# Altium PCB pulsePreamplifier.PcbDoc
Units mil, origin at the board's own origin, x right, y up, seen from the top; angles counter-clockwise.
Board outline 1082.68 x 2755.91 mil, 2 copper layers (Top Layer, Bottom Layer); 46 components, 21 nets, 117 pads, 195 vias.
Unrouted connection lines stored in the file: 1.
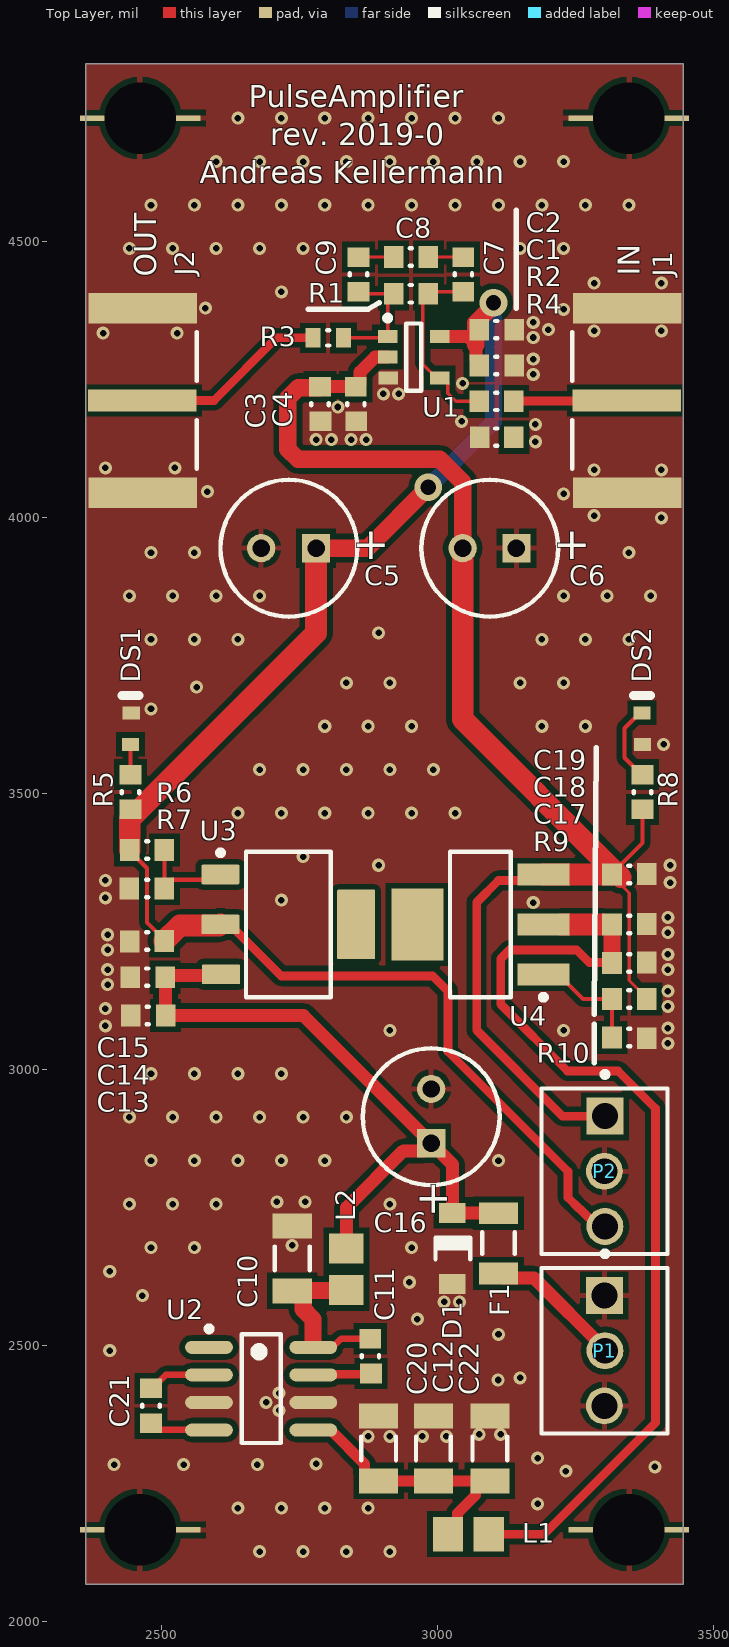
[diagram p0: Top Layer view]
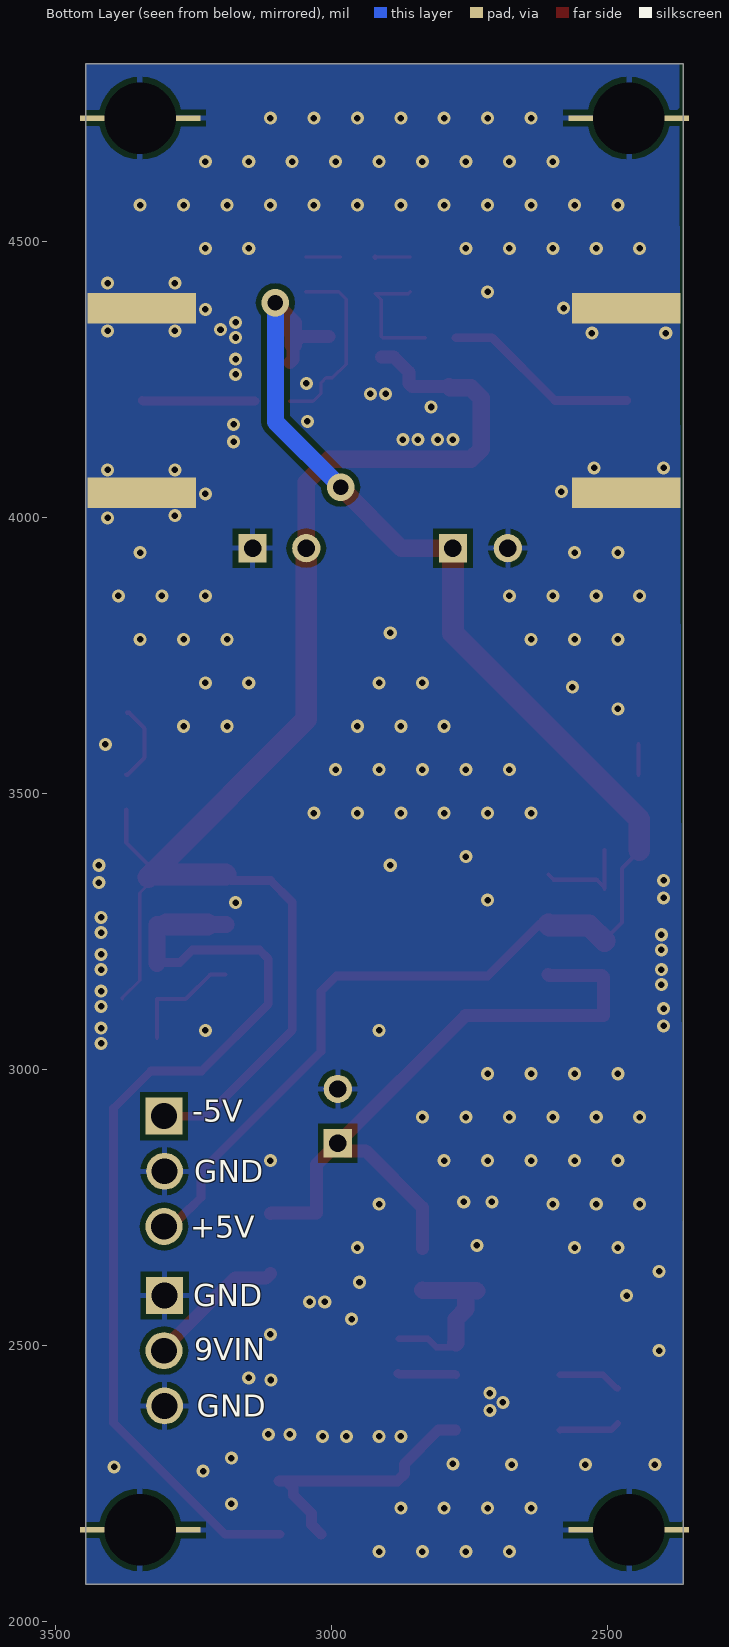
[diagram p1: Bottom Layer view, seen from below]

## Layer stack, top to bottom
Top Solder: solder mask 0.4, Solder Resist, Dk 3.5
Top Layer: signal copper 1.4
Dielectric 1: dielectric 12.6, FR-4, Dk 4.8
Bottom Layer: signal copper 1.4
Bottom Solder: solder mask 0.4, Solder Resist, Dk 3.5

## Board outline
2362.2,4822.83 3444.88,4822.83 3444.88,2066.93 2362.2,2066.93

## Design rules (kind name [scope] priority, off if disabled: settings)
Clearance [All] p1: gap=10 ignorepadtopadclearanceinfootprint=FALSE except(0: Arc-Hole Track-Hole SMDPad-Hole THPad-Hole Via-Hole Fill-Hole Poly-Hole Region-Hole Text-Hole)
PolygonConnect [All] p1: thpad.connectstyle=Relief thpad.reliefconductorwidth=10 thpad.reliefentries=4 thpad.polygonreliefangle="90 Angle" thpad.airgapwidth=10 smdpad.connectstyle=Direct smdpad.reliefconductorwidth=10 smdpad.reliefentries=4 smdpad.polygonreliefangle="90 Angle" smdpad.airgapwidth=10 via.connectstyle=Direct via.reliefconductorwidth=10 via.reliefentries=4 via.polygonreliefangle="90 Angle" via.airgapwidth=10
RoomDefinition pulsePreamplifier [InComponentClass('pulsePreamplifier')] p1: confinementstyle=ConfineIn formatcopy=TRUE lockcomponents=FALSE outline 7045,1060 17145,1060 17145,1755 7045,1755
RoutingVias [All] p1: holewidth=11.81 width=23.62 viastyle="Through Hole" minholewidth=11.81 minwidth=23.62 maxholewidth=236.22 maxwidth=78.74
SolderMaskExpansion [All] p1: expansion=4
Width [All] p1: maxlimit=196.85 minlimit=6 preferedwidth=7.87
30 further rules are at their usual default settings.

## Components (designator, comment, footprint, x,y, rotation, side; value= is the part's Value field where it differs from the comment)
C1 "100nF" CAPC0603(1608)100_N#1 3106.5,4276.06 r180 top
C2 "1uF" CAPC0603(1608)100_N#1 3106.5,4341.06 r180 top value=100nF
C3 "100nF" CAPC0603(1608)100_N#2 2786.5,4206.06 r90 top
C4 "1uF" CAPC0603(1608)100_N#2 2851.5,4206.06 r90 top value=100nF
C5 "ECA-1HM470" PNSC-ECA-1HM470#1 2730.32,3944.88 r180 top
C6 "ECA-1HM470" PNSC-ECA-1HM470#2 3094.49,3944.88 r180 top
C7 "tbd" CAPC0603(1608)100_N#3 3046.5,4441.06 r270 top value=100nF
C8 "tbd" CAPC0603(1608)100_N#3 2951.5,4472.56 r0 top value=100nF
C9 "tbd" CAPC0603(1608)100_N#3 2856.5,4441.06 r90 top value=100nF
C10 "10uF" CAPC1206(3216)190_N 2736.34,2657.48 r270 top value=4.7uF
C11 "opt" CAPC0603(1608)100_N#2 2877.95,2480.32 r90 top value=100nF
C12 "10uF" CAPC1206(3216)190_N 2992.13,2312.99 r270 top value=4.7uF
C13 "100nF" CAPC0603(1608)100_N#4 2474.24,3097.8 r0 top
C14 "1uF" CAPC0603(1608)100_N#4 2473.33,3167.24 r0 top value=100nF
C15 "1uF" CAPC0603(1608)100_N#2 2473.19,3232.8 r0 top value=100nF
C16 "ECA-1HM470" PNSC-ECA-1HM470#3 2988.19,2914.31 r90 top
C17 "100nF" CAPC0603(1608)100_N#2 3347.44,3192.72 r180 top
C18 "1uF" CAPC0603(1608)100_N#2 3347.44,3262.72 r180 top value=100nF
C19 "1uF" CAPC0603(1608)100_N#2 3347.44,3353.27 r180 top value=100nF
C20 "10uF" CAPC1206(3216)190_N 2893.06,2312.99 r270 top value=4.7uF
C21 "1uF" CAPC0603(1608)100_N#3 2480.32,2390.16 r270 top value=100nF
C22 "10uF" CAPC1206(3216)190_N 3094.49,2312.99 r270 top value=4.7uF
D1 "MMSD4148T3G" ONSC-SOD123-2-425G-04_V 3027.56,2675.35 r270 top
DS1 "TLMS1100-GS08" VISH-TLMX1100_V#1 2443.19,3617.8 r90 top
DS2 "TLMS1100-GS08" VISH-TLMX1100_V#2 3370.31,3617.8 r90 top
F1 "ptc" LFUS-1206L012WR_V 3110.24,2685.04 r270 top
J1 "32K145-400L5" ROS-32K145-400L5_V#1 3440.94,4212.6 r270 top locked
J2 "32K145-400L5" ROS-32K145-400L5_V#2 2366.14,4212.6 r90 top locked
L1 "FBMJ2125HM210NT" INDC2013X105X50ML20T30#1 3055.12,2157.48 r0 top
L2 "FBMJ2125HM210NT" INDC2013X105X50ML20T30#2 2834.65,2637.8 r270 top
P1 "22-27-2031" MOLX-22-27-2031_V#1 3303.17,2490.16 r270 top
P2 "22-27-2031" MOLX-22-27-2031_V#2 3303.17,2815.35 r270 top
R1 "tbd" RESC0603(1608)_N#1 2951.5,4406.06 r180 top value="100.00 Ohm"
R2 "100" RESC0603(1608)_N#1 3106.5,4211.06 r180 top value="100.00 Ohm"
R3 "100" RESC0603(1608)_L 2801.5,4326.06 r180 top value="100.00 Ohm"
R4 "100k" RESC0603(1608)_N#2 3106.5,4146.06 r0 top value="100.00 Ohm"
R5 "330" RESC0603(1608)_N#1 2443.19,3502.8 r90 top value="100.00 Ohm"
R6 "tbd" RESC0603(1608)_N#1 2473.19,3397.8 r0 top value="100.00 Ohm"
R7 "tbd" RESC0603(1608)_N#3 2473.19,3327.8 r180 top value="100.00 Ohm"
R8 "330" RESC0603(1608)_N#1 3371.36,3502.8 r90 top value="100.00 Ohm"
R9 "tbd" RESC0603(1608)_N#1 3347.44,3127.72 r180 top value="100.00 Ohm"
R10 "tbd" RESC0603(1608)_N#4 3347.44,3057.72 r0 top value="100.00 Ohm"
U1 "i11 -- OPA659IDBVT" TI-DBV5_L 2956.5,4291.06 r0 top
U2 "TC1044SEOA713" SOIC-OA8_N 2680.06,2421.26 r0 top
U3 "LM317AEMP" DCY0004A_N 2729.24,3262.8 r0 top
U4 "i4 -- LM337IMPX" MP04A_N 3077.44,3262.72 r180 top

## Footprints (in the part's own frame and the unit in brackets; to place one, negate y for a bottom-side part, rotate by r counter-clockwise, add the part's x,y. Pads: shape width x height; smd on the part's side, far side on the other; paste and mask are expansions set on the pad)
CAPC0603(1608)100_N#1 [mm] "Chip Capacitor, Body 1.6x0.8mm, Height 1.0mm, IPC Medium Density"
  rect 0.9x1 smd: 1(-0.827,0) 2(0.8,0)
  silkscreen extent -0.05,-0.4 0.05,0.4, body extent -0.87,-0.48 0.88,0.47, height 1
CAPC0603(1608)100_N#2 [mm] "Chip Capacitor, Body 1.6x0.8mm, Height 1.0mm, IPC Medium Density"
  rect 0.9x1 smd: 1(-0.8,-0.027) 2(0.8,0)
  silkscreen extent -0.05,-0.4 0.05,0.4, body extent -0.87,-0.48 0.88,0.47, height 1
CAPC0603(1608)100_N#3 [mm] "Chip Capacitor, Body 1.6x0.8mm, Height 1.0mm, IPC Medium Density"
  rect 0.9x1 smd: 1(-0.8,0) 2(0.8,0)
  silkscreen extent -0.05,-0.4 0.05,0.4, body extent -0.87,-0.48 0.88,0.47, height 1
CAPC0603(1608)100_N#4 [mm] "Chip Capacitor, Body 1.6x0.8mm, Height 1.0mm, IPC Medium Density"
  rect 0.9x1 smd: 1(-0.773,0) 2(0.827,0)
  silkscreen extent -0.05,-0.4 0.05,0.4, body extent -0.87,-0.48 0.88,0.47, height 1
CAPC1206(3216)190_N [mm] "Chip Capacitor, Body 3.2x1.6mm, Height 1.9mm, IPC Medium Density"
  rect 1.15x1.8 smd: 1(-1.5,0) 2(1.5,0)
  silkscreen extent -0.55,-0.8 0.55,0.8, body extent -1.7,-0.9 1.7,0.9, height 1.9
DCY0004A_N [mm] "SOT223, 4-Leads, Body 6.7x3.7mm, Pitch 2.3mm, IPC Medium Density"
  rrect11% 1.75x0.9 smd: 1(-3.125,2.3) 2(-3.125,0) 3(-3.098,-2.3)
  rrect6% 1.75x3.2 smd: 4(3.125,0)
  silkscreen extent -3.25,-3.35 1.95,3.42, body extent -3.5,-3.25 3.5,3.25, height 1.62
INDC2013X105X50ML20T30#1 [mm] "Chip Inductor, 2-Leads, Body 2.2x1.45mm, IPC Low Density"
  rect 1.39x1.59 smd: 1(-0.928,0) 2(0.955,0)
  body extent -1.1,-0.72 1.1,0.72, height 1.05
INDC2013X105X50ML20T30#2 [mm] "Chip Inductor, 2-Leads, Body 2.2x1.45mm, IPC Low Density"
  rect 1.39x1.59 smd: 1(-0.955,0) 2(0.955,0)
  body extent -1.1,-0.72 1.1,0.72, height 1.05
LFUS-1206L012WR_V [mm] "SMD, 2-Leads, Body 3.2x1.65mm"
  rect 1x1.8 smd: 1(-1.373,0) 2(1.4,0)
  silkscreen extent -0.5,-0.75 0.5,0.75, body extent -1.6,-0.82 1.6,0.82, height 1.45
MOLX-22-27-2031_V#1 [mm] "Header, 3-Leads, Body 7.62x5.8mm, Pitch 2.54mm"
  rect 1.7x1.7 hole 1.19 paste+0: 1(-2.54,-0.027)
  round 1.7 hole 1.19 paste+0: 2(0,0) 3(2.54,-0.027)
  silkscreen extent -4.58,-2.92 3.81,2.88, body extent -3.81,-2.92 3.81,2.88, height 11.71
MOLX-22-27-2031_V#2 [mm] "Header, 3-Leads, Body 7.62x5.8mm, Pitch 2.54mm"
  rect 1.7x1.7 hole 1.19 paste+0: 1(-2.54,0)
  round 1.7 hole 1.19 paste+0: 2(0,-0.027) 3(2.54,0)
  silkscreen extent -4.58,-2.92 3.81,2.88, body extent -3.81,-2.92 3.81,2.88, height 11.71
MP04A_N [mm] "SOT223, 4-Leads, Body 6.5x3.5mm, Pitch 2.3mm, Lead Span 7mm, IPC Medium Density"
  rect 2.4x1 smd: 1(-2.9,2.3) 2(-2.9,0) 3(-2.9,-2.3)
  rect 2.4x3.3 smd: 4(2.9,0)
  silkscreen extent -3.03,-3.35 1.4,3.47, body extent -1.86,-3.35 1.86,3.35, height 1.8
ONSC-SOD123-2-425G-04_V [mm] "SOD123, 2-Leads, Body 2.69x1.6mm, Height 1.35mm"
  rect 0.915x1.22 smd: 1(-1.637,-0.027) 2(1.637,-0.027)
  silkscreen extent -0.5,-0.8 0.5,0.8, body extent -1.35,-0.8 1.35,0.8, height 1.35
PNSC-ECA-1HM470#1 [mm]
  rect 1.3x1.3 hole 0.8: 1(-1.25,0)
  round 1.3 hole 0.8: 2(1.277,0)
  silkscreen extent -3.15,-3.15 3.15,3.15, body extent -3.15,-3.15 3.15,3.15, height 12.2
PNSC-ECA-1HM470#2 [mm]
  rect 1.3x1.3 hole 0.8: 1(-1.223,0)
  round 1.3 hole 0.8: 2(1.25,0)
  silkscreen extent -3.15,-3.15 3.15,3.15, body extent -3.15,-3.15 3.15,3.15, height 12.2
PNSC-ECA-1HM470#3 [mm]
  rect 1.3x1.3 hole 0.8: 1(-1.223,0)
  round 1.3 hole 0.8: 2(1.277,0)
  silkscreen extent -3.15,-3.15 3.15,3.15, body extent -3.15,-3.15 3.15,3.15, height 12.2
RESC0603(1608)_L [mm] "Chip Resistor, Body 1.6x0.8mm, IPC High Density"
  rect 0.7x0.9 smd: 1(-0.7,0) 2(0.7,0)
  silkscreen extent -0.05,-0.35 0.05,0.35, body extent -0.85,-0.47 0.85,0.47, height 0.6
RESC0603(1608)_N#1 [mm] "Chip Resistor, Body 1.6x0.8mm, IPC Medium Density"
  rect 0.9x1 smd: 1(-0.8,0) 2(0.8,0)
  silkscreen extent -0.05,-0.4 0.05,0.4, body extent -0.85,-0.47 0.85,0.47, height 0.6
RESC0603(1608)_N#2 [mm] "Chip Resistor, Body 1.6x0.8mm, IPC Medium Density"
  rect 0.9x1 smd: 1(-0.773,0) 2(0.8,0)
  silkscreen extent -0.05,-0.4 0.05,0.4, body extent -0.85,-0.47 0.85,0.47, height 0.6
RESC0603(1608)_N#3 [mm] "Chip Resistor, Body 1.6x0.8mm, IPC Medium Density"
  rect 0.9x1 smd: 1(-0.8,0) 2(0.827,0)
  silkscreen extent -0.05,-0.4 0.05,0.4, body extent -0.85,-0.47 0.85,0.47, height 0.6
RESC0603(1608)_N#4 [mm] "Chip Resistor, Body 1.6x0.8mm, IPC Medium Density"
  rect 0.9x1 smd: 1(-0.8,0) 2(0.8,-0.027)
  silkscreen extent -0.05,-0.4 0.05,0.4, body extent -0.85,-0.47 0.85,0.47, height 0.6
ROS-32K145-400L5_V#1 [mm] "SMA Right Angle Jack, Edge Mount, 14.25x9.5x4.46mm, Rosenberger Recommended"
  rect 1x5 smd: 1(0,-2.5)
  rect 1.4x5 smd: MP(-4.25,-2.473) MP(4.25,-2.473)
  rect 1.4x5 smd far side paste-2: MP(-4.25,-2.473) MP(4.25,-2.473)
  silkscreen extent -3.15,-5 3.15,-5, body extent -4.75,-4.75 4.75,9.5, height 4.2
ROS-32K145-400L5_V#2 [mm] "SMA Right Angle Jack, Edge Mount, 14.25x9.5x4.46mm, Rosenberger Recommended"
  rect 1x5 smd: 1(0,-2.5)
  rect 1.4x5 smd: MP(-4.25,-2.527) MP(4.25,-2.527)
  rect 1.4x5 smd far side paste-2: MP(-4.25,-2.527) MP(4.25,-2.527)
  silkscreen extent -3.15,-5 3.15,-5, body extent -4.75,-4.75 4.75,9.5, height 4.2
SOIC-OA8_N [mm] "SOIC, 8-Leads, Body 4.9x3.9mm, Pitch 1.27mm, IPC Medium Density"
  oval 2.2x0.6 smd: 1(-2.4,1.905) 2(-2.4,0.635) 3(-2.4,-0.635) 4(-2.4,-1.905) 5(2.4,-1.905) 6(2.4,-0.635) 7(2.4,0.635) 8(2.4,1.905)
  silkscreen extent -2.52,-2.5 0.9,2.88, body extent -2,-2.5 2,2.5, height 1.75
TI-DBV5_L [mm] "SOT23, 5-Leads, Body 2.9x1.6mm, Pitch 0.95mm, IPC High Density"
  rect 0.9x0.6 smd: 1(-1.2,0.95) 2(-1.2,0) 3(-1.173,-0.95) 4(1.2,-0.95) 5(1.2,0.95)
  silkscreen extent -1.32,-1.55 0.35,1.92, body extent -0.87,-1.52 0.87,1.53, height 1.45
VISH-TLMX1100_V#1 [mm] "SMD, 2-Leads, Body 1.6x0.8mm"
  rect 0.6x0.8 smd: 1(-0.725,0) 2(0.725,-0.027)
  silkscreen extent 1.53,-0.4 1.53,0.4, body extent -0.8,-0.4 0.8,0.4, height 0.65
VISH-TLMX1100_V#2 [mm] "SMD, 2-Leads, Body 1.6x0.8mm"
  rect 0.6x0.8 smd: 1(-0.725,-0.027) 2(0.725,0)
  silkscreen extent 1.53,-0.4 1.53,0.4, body extent -0.8,-0.4 0.8,0.4, height 0.65

## Part data
C1 C3 C13 C17: library part CMP-1035-02589-1, "CAP 100nF 25V ±20% 0603 (1608 Metric) Thickness 1mm SMD", Case-EIA=0603, Case-Metric=1608, Rated Voltage="25 V", Tolerance=±20%, Max Thickness="1 mm", Technology=SMT
C2 C4 C7 C8 C9 C11 C14 C15 C18 C19 C21: library part CMP-1035-02589-1, "CAP 1uF 25V ±20% 0603 (1608 Metric) Thickness 1mm SMD", Case-EIA=0603, Case-Metric=1608, Rated Voltage="25 V", Tolerance=±20%, Max Thickness="1 mm", Technology=SMT
C5 C6 C16: library part CMP-1665-00013-1, "CAP ALUM 47UF 50V 20% RADIAL", ComponentLink1Description=Datasheet, ComponentLink1URL=http://industrial.panasonic.com/cdbs/www-data/pdf/RDF0000/ABA0000C1047.pdf, PackageReference=ECA-1HM470, PartNumber=ECA-1HM470
C10 C12 C20 C22: library part CMP-1037-04919-1, Case-EIA=1206, Case-Metric=3216, Rated Voltage="25 V", Tolerance=±20%, Max Thickness="1.9 mm", Technology=SMT
D1: library part CMP-0895-00002-1, "Switching Diode, 100 V, 200 mA, -55 to 150 degC, 2-Pin SOD123 (425), RoHS, Tape and Reel", Manufacturer="ON Semiconductor", Temperature Range="-55 to 150 degC", CD (Max)="4 pF", ComponentLink1Description="Manufacturer URL", ComponentLink1URL=http://www.onsemi.com/, ComponentLink2Description=Datasheet, ComponentLink2URL=http://www.onsemi.com/pub_link/Collateral/MMSD4148T1-D.PDF, ComponentLink3Description="Package Specification", ComponentLink3URL=http://www.onsemi.com/pub_link/Collateral/425-04.PDF, DatasheetVersion="Rev. 11", IR @ VR="75 V (Max)=50 uA", Mounting Technology="Surface Mount", PackageDescription="2-Pin SOD123, Body 2.69 x 1.6 mm, Height 1.35 mm", PackageReference=SOD123-2-425G-04, PackageVersion="Rev. 04G", Packing="Tape and Reel", PartNumber=MMSD4148T3G, PD (Max)="425 mW", RoHS=TRUE, Trr (Max)="4 ns", VBR (Min)="100 V", VF (Max)="1 A"
DS1 DS2: library part CMP-1666-00027-1, "LED, RED, 2.1 V, -40 to 100 degC, 2-Pin SMD (0603), RoHS, Tape and Reel", Capacitance="12 pF", Case/Package=0603, Case Code (Metric)=1608, Max Operating Temperature=125degC, Min Operating Temperature=-55degC, Package Quantity=4000, Resistance="100000000000 Ohm", Tolerance=5%, Type (Capacitors)=C0G, Voltage Rating="50 V", Case Code (Imperial)=0603, ComponentLink1Description="Manufacturer URL", ComponentLink1URL=http://www.vishay.com/, ComponentLink2Description=Datasheet, ComponentLink2URL=http://www.vishay.com/docs/83173/tlmb1100.pdf, DatasheetVersion="Rev. 2.7, 03/2016", Height="0.8 mm", Length="1.6 mm", Mount="Surface Mount", PackageDescription="2-Pin Surface Mount Device, Body 1.6 x 0.8 mm", PackageReference=TLMX1100, Packaging="Tape and Reel", Pins=2, Radiation Hardening=No, REACH SVHC="No SVHC", RoHSCompliant=True, Voltage Rating (DC)="50 V", Width="0.8 mm"
F1: library part CMP-2000-05470-1, "200mA PTC", Hold Current [Ih]=0.125A, Manufacturer=Littelfuse, Operating Temp Range=-40to+85°C, Package Description="2-Pin Surface Mount Device, Body 3.2 x 1.65 mm", Package Reference=1206, Trip Current=0.29A, Working Voltage-Max=30V, Datasheet URL=https://datasheet.ciiva.com/26787/1206l012wr-26787215.pdf, Datasheet Version=04/2012, Manufacturer URL=http://www.littelfuse.com/, Mounting Technology=SurfaceMount, Size=1206
J1 J2: library part CMP-0751-00004-2, "SMA Right Angle Jack, Edge Mount, Up to 18 GHz, -55 to 155 degC", Manufacturer=Rosenberger, ComponentLink1Description="Manufacturer URL", ComponentLink1URL=http://www.rosenberger.de, ComponentLink2Description=Datasheet, ComponentLink2URL=http://rosenberger.de/ok/images/documents/db/32K145-400L5.pdf, ComponentLink3Description="Package Specification", ComponentLink3URL=http://rosenberger.de/ok/images/documents/db/32K145-400L5.pdf, ComponentLink4Description="Series Overview / Design Note", ComponentLink4URL=http://rosenberger.de/ok/images/documents/spez/32.pdf, ComponentLink5Description="Webshop / RFQ", ComponentLink5URL=http://www.rosenberger.com/en/contact/sales/, DatasheetVersion=b00, Desgin Note 2="For more information about DRC setting, please look at following webpage, http://techdocs.altium.com/display/SCRT/Design+Rule+for+Edge-Mount+Connectors", Design Note 1="Footprint in library is a generic example - only application specific footprint delivers High Performance", Mounting Technology="Surface Mount", PackageDescription="SMA Right Angle Jack, Edge Mount, 14.25 x 9.5 x 4.46 mm", PackageReference=32K145-400L5, PackageVersion=b00, PartNumber=32K145-400L5
L1 L2: library part CMP-1660-00003-1, "Chip Inductor, 21 Ohm, +/- 30%, 6 A, -40 to 125 degC, 0805 (2012 Metric), RoHS, Tape and Reel", Case\Package=0805, Case Code (Metric)=2012, Current Rating="6 A", Max Operating Temperature="125 degC", Min Operating Temperature="-40 degC", Package Quantity=1, Resistance="4 mohm", Tolerance=30%, Case Code (Imperial)=0805, ComponentLink1Description="Manufacturer URL", ComponentLink1URL=http://www.t-yuden.com/, ComponentLink2Description=Datasheet, ComponentLink2URL=http://ds.yuden.co.jp/TYCOMPAS/ut/detail.do?productNo=FBMJ2125HM210NT&fileName=FBMJ2125HM210NT_SS&mode=specSheetDownload, Core Material=Ferrite, DatasheetVersion=08/2016, Height="0.85 mm", Impedance="21 Ohm", Length="2 mm", Max Current Rating="6 A", Mount="Surface Mount", Mounting Technology="Surface Mount", PackageDescription="2-Pin Surface Mount Device, Body 2 x 1.25 mm", PackageReference=0805, Packaging="Tape and Reel", REACH SVHC=Unknown, RoHSCompliant=true, Width="1.25 mm"
P1 P2: library part CMP-2000-05538-1, "Male Header, Pitch 2.54 mm, 1 x 3 Position, Height 11.7 mm, Tail Length 3.56 mm, -40 to 80 degC, RoHS, Bulk", Current Rating=4A, Manufacturer=Molex, Operating temperature=0°Cto+75°C, Package Description="Male Header, Pitch 2.54 mm, 1 x 3 Position, Height 11.7 mm, Tail Length 3.56 mm", Voltage Rating=250V, Contact material=Tinplatedbrass, Datasheet URL=http://www.molex.com/webdocs/datasheets/pdf/en-us/0022272031_PCB_HEADERS.pdf, Datasheet Version=06/2016, Housing material=Nylon(UL94V-0), Manufacturer URL=http://www.molex.com/, Mounting Technology=ThroughHole, Package Reference=22-27-2031, Package URL=http://www.molex.com/pdm_docs/sd/022272031_sd.pdf
R1 R2 R3 R4 R5 R6 R7 R8 R9 R10: library part CMP-1012-00397-1, "100R 0.1W 1% 0603 (1608 Metric)  SMD", Case-EIA=0603, Case-Metric=1608, Power="0.1 W", Tolerance="1 %", Technology=SMT
U1: library part CMP-0018-00409-1, "650 MHz Unity Gain Stable JFET Input Amplifier, 7 to 13 V, -40 to 85 degC, 5-pin SOT23 (DBV5), Green (RoHS & no Sb/Br)", Manufacturer="Texas Instruments", PartNumber=OPA659IDBVT, 2nd Harmonic(dBc)=79, 3rd Harmonic(dBc)=100, @ MHz=10, Acl, min stable gain(V/V)=2, BW @ Acl(MHz)=650, Code_JEDEC=MO-178, ComponentLink1Description="Manufacturer URL", ComponentLink1URL=http://www.ti.com/, ComponentLink2Description=Datasheet, ComponentLink2URL=http://www.ti.com/general/docs/lit/getliterature.tsp?genericPartNumber=OPA659&fileType=pdf, ComponentLink3Description="Package Specification", ComponentLink3URL=http://www.ti.com/litv/pdf/mpds018i, DatasheetVersion=SBOS342B, Eco-Plan="Green (RoHS & no Sb/Br)", Iib(Max)(nA)=1.2, Io(Typ)(mA)=70, Iq per channel(Max)(mA)=33.5, Mounting Technology="Surface Mount", Number of Channels=1, PackageDescription="5-Pin Plastic Small Outline, Body 1.6 x 2.9 mm, Pitch 0.95 mm", PackageReference=DBV5, PackageVersion="4073253-4/K, 03/2006", Slew Rate(Typ)(V/us)=2550, Sub Family="High Output Current Amplifier (>=50mA), High Speed Amplifier (>=50MHz)", THD (Fc is 1 MHz)(Typ)(dB)=-78, Vio(Max)(mV)=5, Vn at Flatband(Typ)(nV/rtHz)=8.9, Vs(Max)(V)=13, Vs(Min)(V)=7
U2: library part CMP-0132-00045-1, "Charge Pump DC-TO-DC Voltage Converter, 8-Pin SOIC 150mil, Industrial Temperature, Tape and Reel", Code_IPC=SOIC127P600-8, DatasheetVersion="revA, Oct-2002", PackageDescription="8-Lead Plastic Small Outline (OA) - Narrow, 3.90mm Body [SOIC]", PackageReference=SOIC-OA8, PackageVersion="revBB, Aug-2009"
U3: library part CMP-0062-01709-3, "3-Terminal Adjustable Regulator, 4-pin SOT-223", Manufacturer="Texas Instruments", PackageTopMarking=XYTT*N07A, PowerWise=N, Code_IPC=SOT223-4, Code_JEDEC=TO-261-AA, ComponentLink1Description="Datasheet URL", ComponentLink1URL=http://www.ti.com/general/docs/lit/getliterature.tsp?genericPartNumber=LM317-N&fileType=pdf, CompType="LDO IC", PackageDescription="Molded SOT-223, 6.50 x 3.56 x 1.6mm Body, 4 Lead, 2.3mm Pitch", PackageReference=DCY0004A, PinCount=4, RoHS=N
U4: library part CMP-0062-01833-1, "3-Terminal Adjustable Negative Regulator, 4-pin SOT-223", Manufacturer="National Semiconductor", PackageTopMarking=XYTT*N02A, PowerWise=N, Code_IPC=SOT223-4, Code_JEDEC=TO-261-AA, CompType="LDO IC", DatasheetVersion=Nov-2004, PackageDescription="Molded SOT-223, 6.50 x 3.56 x 1.6mm Body, 4 Lead, 2.3mm Pitch", PackageReference=MP04A, PackageVersion="revB, Apr-2003", PinCount=4, RoHS=N

## Free pads (board coordinates)
  rect 218x10 hole 129.92: 1(2460.63,4724.41) 2(3346.46,4724.41) 3(3346.46,2165.35) 4(2460.63,2165.35)

## Via types
v1: diameter 23.62, hole 11.81, Top Layer to Bottom Layer, tented both sides, 166 vias
v2: diameter 23.62, hole 11.81, Top Layer to Bottom Layer, 27 vias
v3: diameter 50, hole 28, Top Layer to Bottom Layer, tented both sides, 2 vias

## Nets (pads, with @x,y where several pads share a name; then routed paths per layer and width w, separated by ;. In a path a pad name is that pad's centre, name@x,y a point inside that pad or via, vN(x,y) a via of type N, cw(c..) or ccw(c..) an arc to the next point about the centre after c; other vN are vias at no path point)
+5V: C1.2 C2.2 C5.1 C15.2 P2.3 R5.1 R6.1 U1.5 U3.2 | length 2839.6
  Top Layer w7.87: R6.1 2441.69,3395.83 2473.03,3364.49 2473.03,3266.42 2504.68,3234.76 C15.2
  Top Layer w15.75: U3.2 2622.94,3262.8 2716.44,3169.29 2991.01,3169.29 3018.57,3141.73 3018.57,3032.61 3236.22,2814.96 3236.22,2767.72 3256.52,2747.42 3257.26,2747.42 3289.32,2715.35 P2.3
  Top Layer w23.62: 2647.64,3659.36 2649.65,3661.37 ; U1.5 3054.09,4328.46 3069.09,4313.46 3069.09,4286.97 C1.2@3075,4281.06
  Top Layer w31.5: C5.1 2872.76,3944.88 v3(2982.99,4055.12) ; 3069.09,4313.46 3069.09,4353.01 3101.18,4385.1 v3(3101.18,4390.1) ; C2.2 C2.2@3076.97,4343.03
  Top Layer w39.37: R6.1 2441.69,3453.41 2647.64,3659.36 ; C15.2 2532.72,3260.83 2604.24,3260.83 U3.2 ; 2649.65,3661.37 2779.53,3791.25 C5.1
  Bottom Layer w31.5: v3(2982.99,4055.12) 2982.99,4055.83 3101.18,4174.02 v3(3101.18,4390.1)
+9V: C13.2 C14.2 C16.1 D1.1 F1.1 L2.1 U3.3 | length 1251.7
  Top Layer w23.62: U3.3 2605.03,3170.02 2509,3170.02 2506.78,3167.8 C13.2 2756.54,3097.8 C16.1 ; L2.1 2834.65,2749.29 2937.71,2852.36 2974.41,2852.36 C16.1 ; F1.1 3109.52,2739.82 D1.1 3026.51,2827.82 C16.1
-5V: C3.2 C4.2 C6.2 C19.2 P2.1 R8.1 R9.1 U1.2 U4.3 | length 2678.2
  Top Layer w6: C19.2@3315.94,3351.3 3347.44,3319.8 3347.44,3161.18 3378.94,3129.69 R9.1
  Top Layer w7.87: C19.2 3315.94,3355.24 3320.37,3359.67 3371.36,3410.65 R8.1
  Top Layer w15.75: U4.3 3180.87,3342.52 3110.24,3342.52 3070.87,3303.15 3070.87,3070.87 3226.38,2915.35 P2.1
  Top Layer w23.62: C3.2 C4.2 2853.46,4237.56 2859.37,4243.46 2859.37,4264.15 2886.28,4291.06 U1.2
  Top Layer w31.5: C3.2 2784.53,4235.59 2747.4,4235.59 2728.35,4216.54 2728.35,4124.32 2746.8,4105.87 3004.01,4105.87 3045.28,4064.6 C6.2
  Top Layer w39.37: C6.2 3045.28,3634.76 3320.37,3359.67 3321.36,3358.68 C19.2@3331.69,3348.35 ; U4.3 C19.2
-9V: C17.2 C18.2 L1.2 U4.2 | length 1792.6
  Top Layer w15.75: L1.2 3192.76,2157.48 3394.68,2359.41 3394.68,2929.13 3326.77,2997.05 3235.24,2997.05 3114.17,3118.11 3114.17,3200.79 3129.92,3216.54 3251.97,3216.54 3274.61,3193.9 3314.76,3193.9 C17.2
  Top Layer w31.5: U4.2 U4.2@3224.41,3262.72 ; C17.2 C18.2
  Top Layer w39.37: U4.2@3224.41,3262.72 C18.2@3299.21,3262.72
GND: C1.1 C2.1 C3.1 C4.1 C5.2 C6.1 C10.1 C12.1 C13.1 C14.1 C15.1 C16.2 C17.1 C18.1 C19.1 C20.1 C22.1 D1.2 DS1.2 DS2.1 J1.MP J2.MP P1.1 P1.3 P2.2 pad.1 pad.2 pad.3 pad.4 R4.1 R7.2 R10.2 U1.3 U2.3 U2.6
  other v1: 2677.17,2125.99 2755.91,2125.99 2834.65,2125.99 2913.39,2125.99 2637.8,2204.73 2716.54,2204.73 2795.28,2204.73 2874.02,2204.73 3149.61,2440.95 3110.24,2519.69 3011.81,2578.74 3039.37,2578.74 2480.32,2677.17 2559.06,2677.17 2952.76,2677.17 2440.95,2755.91 2519.69,2755.91 2598.43,2755.91 2913.39,2755.91 2480.32,2834.65 2559.06,2834.65 2637.8,2834.65 2716.54,2834.65 2795.28,2834.65 3110.24,2834.65 2440.95,2913.39 2519.69,2913.39 2598.43,2913.39 2677.17,2913.39 2755.91,2913.39 2834.65,2913.39 2480.32,2992.13 2559.06,2992.13 2637.8,2992.13 2716.54,2992.13 3417.32,3047.24 2913.39,3070.87 3228.35,3070.87 3417.32,3074.8 2397.64,3078.74 2397.64,3110.24 3417.32,3114.17 3417.32,3141.73 2401.57,3153.54 2401.57,3181.1 3417.32,3181.1 3417.32,3208.66 2401.57,3216.54 2401.57,3244.09 3417.32,3248.03 3417.32,3275.59 3173.23,3302.51 2716.54,3307.09 2397.64,3311.02 3421.26,3338.58 2397.64,3342.52 2893.06,3370.08 3421.26,3370.08 2755.91,3385.83 2637.8,3464.57 2716.54,3464.57 2795.28,3464.57 2874.02,3464.57 2952.76,3464.57 3031.5,3464.57 2677.17,3543.31 2755.91,3543.31 2834.65,3543.31 2913.39,3543.31 2992.13,3543.31 3409.45,3589.25 2795.28,3622.05 2874.02,3622.05 2952.76,3622.05 3188.98,3622.05 3267.72,3622.05 2480.32,3653.54 2834.65,3700.79 2913.39,3700.79 3149.61,3700.79 3228.35,3700.79 2480.32,3779.53 2559.06,3779.53 2637.8,3779.53 3188.98,3779.53 3267.72,3779.53 3346.46,3779.53 2893.06,3791.25 2440.95,3858.27 2519.69,3858.27 2598.43,3858.27 2677.17,3858.27 3228.35,3858.27 3307.09,3858.27 3385.83,3858.27 2480.32,3937.01 2559.06,3937.01 3346.46,3937.01 3405.51,4000 3283.46,4003.94 3228.35,4043.31 2582.68,4047.24 3283.46,4086.61 3405.51,4086.61 2397.64,4090.55 2523.62,4090.55 3177.17,4137.8 2779.53,4141.73 2807.09,4141.73 2842.94,4141.73 2870.08,4141.73 3177.17,4169.29 3043.31,4174.57 2818.9,4200.79 2901.57,4224.41 2929.13,4224.41 3045.28,4243.46 3173.23,4259.84 3173.23,4287.4 3173.23,4326.77 2393.7,4334.65 2527.56,4334.65 3283.46,4338.58 3405.51,4338.58 3200.79,4341.06 3173.23,4354.33 3228.35,4377.95 2578.74,4379.92 2716.54,4409.45 3283.46,4425.2 3405.51,4425.2 2440.95,4488.19 2519.69,4488.19 2598.43,4488.19 2677.17,4488.19 2755.91,4488.19 3149.61,4488.19 3228.35,4488.19 2480.32,4566.93 2559.06,4566.93 2637.8,4566.93 2716.54,4566.93 2795.28,4566.93 2874.02,4566.93 2952.76,4566.93 3031.5,4566.93 3110.24,4566.93 3188.98,4566.93 3267.72,4566.93 3346.46,4566.93 2598.43,4645.67 2677.17,4645.67 2755.91,4645.67 2834.65,4645.67 2913.39,4645.67 2992.13,4645.67 3070.87,4645.67 3149.61,4645.67 3228.35,4645.67 2637.8,4724.41 2716.54,4724.41 2795.28,4724.41 2874.02,4724.41 2952.76,4724.41 3031.5,4724.41 3110.24,4724.41
  other v2: 3181.1,2212.6 3232.28,2271.65 3393.7,2279.53 2413.39,2283.46 2539.37,2283.46 2673.23,2283.46 2779.53,2284.83 3181.1,2295.28 2874.02,2334.65 2913.39,2334.65 2972.44,2334.65 3015.75,2334.65 3075,2338.58 3114.17,2338.58 2712.6,2381.89 2688.98,2396.26 2712.6,2413.39 3109.52,2437.01 2405.51,2490.35 2963.27,2547.24 2464.57,2590.16 2948.82,2614.17 2405.51,2633.86 2736.22,2681.1 2708.66,2759.84 2759.84,2759.84 2562.99,3692.91
NetC7_1: C7.1 C8.2 | length 63.5
  Top Layer w6: C8.2 C7.1
NetC7_2: C7.2 R1.1 R2.2 U1.4 | length 337.8
  Top Layer w6: C7.2 2986.5,4409.57 R1.1 2973.02,4396.09 2973.02,4278.47 2997.83,4253.66 U1.4 3009.65,4253.66 3018.46,4244.85 3018.46,4225.64 3033.03,4211.06 R2.2
NetC8_1: C8.1 C9.2 | length 63.5
  Top Layer w6: C9.2 C8.1
NetC9_1: C9.1 R1.2 R3.1 U1.1 | length 228.2
  Top Layer w6: R3.1 2906.85,4326.06 U1.1 2909.25,4395.31 R1.2 2860,4406.06 C9.1
NetC10_2: C10.2 C11.2 L2.2 U2.8 | length 325.9
  Top Layer w11.81: U2.8 2809.24,2496.26 2824.79,2511.81 C11.2
  Top Layer w31.5: U2.8@2774.54,2504.77 2773.94,2505.38 2773.94,2547.24 2756.02,2565.16 2756.02,2591.54 2749.13,2598.43 C10.2 2737.22,2599.31 2833.76,2599.31 L2.2
NetC11_1: C11.1 U2.7 | length 105.5
  Top Layer w15.75: U2.7 2775.82,2447.54 2877.72,2447.54 C11.1
NetC12_2: C12.2 C20.2 C22.2 L1.1 U2.5 | length 491.4
  Top Layer w19.68: U2.5 2806.04,2346.26 2867.47,2284.83 2867.47,2266.73 2880.27,2253.94 C20.2 C12.2 C22.2@3081.69,2253.94 ; L1.1 3036.09,2175 3036.09,2195.54 3068.9,2228.35 3068.9,2241.14 C22.2@3081.69,2253.94 ; C22.2 C22.2@3081.69,2253.94
NetC21_1: C21.1 U2.2 | length 115.4
  Top Layer w11.81: C21.1 2482.28,2421.65 2506.89,2446.26 U2.2
NetC21_2: C21.2 U2.4 | length 110.4
  Top Layer w11.81: C21.2 2492.13,2346.85 2584.98,2346.85 U2.4
NetDS1_1: DS1.1 R5.2 | length 55
  Top Layer w7.87: R5.2 DS1.1
NetDS2_2: DS2.2 R8.2 | length 142.2
  Top Layer w7.87: DS2.2 3366.38,3646.34 3338.58,3618.54 3338.58,3565.1 3369.39,3534.29 R8.2
NetF1_2: F1.2 P1.2 | length 253.7
  Top Layer w23.62: F1.2 3118.11,2622.05 3174.39,2622.05 P1.2@3306.08,2490.35
NetJ1_1: J1.1 R2.1 R4.2 | length 205.2
  Top Layer w15.75: R2.1 3138.76,4211.83 3341.75,4211.83 J1.1
NetJ2_1: J2.1 R3.2 | length 356.4
  Top Layer w15.75: J2.1 2594.49,4212.6 2707.95,4326.06 R3.2
NetR6_2: R6.2 R7.1 U3.1 | length 181.3
  Top Layer w7.87: R7.1 R7.1@2504.68,3329.76 ; R6.2 R7.1@2504.68,3329.76 ; U3.1 2596.4,3343.54 2518.46,3343.54 R7.1@2504.68,3329.76
NetR9_2: R9.2 R10.1 U4.1 | length 212.7
  Top Layer w7.87: U4.1 3219.17,3172.17 3263.62,3127.72 R9.2 R10.1
pads on no net: U2.1 U3.4 U4.4

## Polygon pours and split planes (outlines as drawn)
GND on Bottom Layer (solid, remove dead copper, pour order 2): 2369.06,4822.83 3444.88,4822.83 3444.88,2066.93 2362.2,2066.93
GND on Top Layer (solid, remove dead copper, pour order 0): 2362.2,4822.83 3444.88,4822.83 3444.88,2066.93 2362.2,2066.93

## Silkscreen, mask and mechanical layers (free items; w line width, h text height)
Top Overlay:
  lines w10: 2765.75,4377.95 2874.02,4377.95 2893.7,4389.76 ; 3142.65,4379.92 3142.65,4557.09 ; 3283.46,3011.81 3283.46,3082.05 ; 3283.46,3100.39 3287.4,3582.68
  text "PulseAmplifier" at 2657.48,4744.09 h39.37
  text "rev. 2019-0" at 2696.85,4675.2 h39.37
  text "Andreas Kellermann" at 2568.9,4606.3 h39.37
  text "IN" at 3366.14,4438.98 h39.37 r90
  text "OUT" at 2490.16,4437.28 h39.37 r90
Bottom Overlay:
  text "-5V" at 3251.97,2905.51 h39.37
  text "GND" at 3248.03,2795.28 h39.37
  text "+5V" at 3255.91,2695.03 h39.37
  text "GND" at 3250,2570.87 h39.37
  text "9VIN" at 3248.03,2472.44 h39.37
  text "GND" at 3244.09,2370.08 h39.37
Mechanical 3:
  lines w10: 2362.2,4822.83 2362.2,2066.93 3444.88,2066.93 3444.88,4822.83 2366.14,4822.83

## Text inside footprints (layer, text, board x,y; h text height)
C5: Top Overlay "+" at 2913.39,3974.41 h59.06 r180
C6: Top Overlay "+" at 3277.56,3974.41 h59.06 r180
C16: Top Overlay "+" at 3017.72,2731.24 h59.06 r90
J1: Mechanical 3 "Board Edge" at 3440.94,4531.5 h7.87 r270
J2: Mechanical 3 "Board Edge" at 2366.14,3893.7 h7.87 r90